# EAGLE board BatteryHolderBoard (EAGLE 7.5.0)
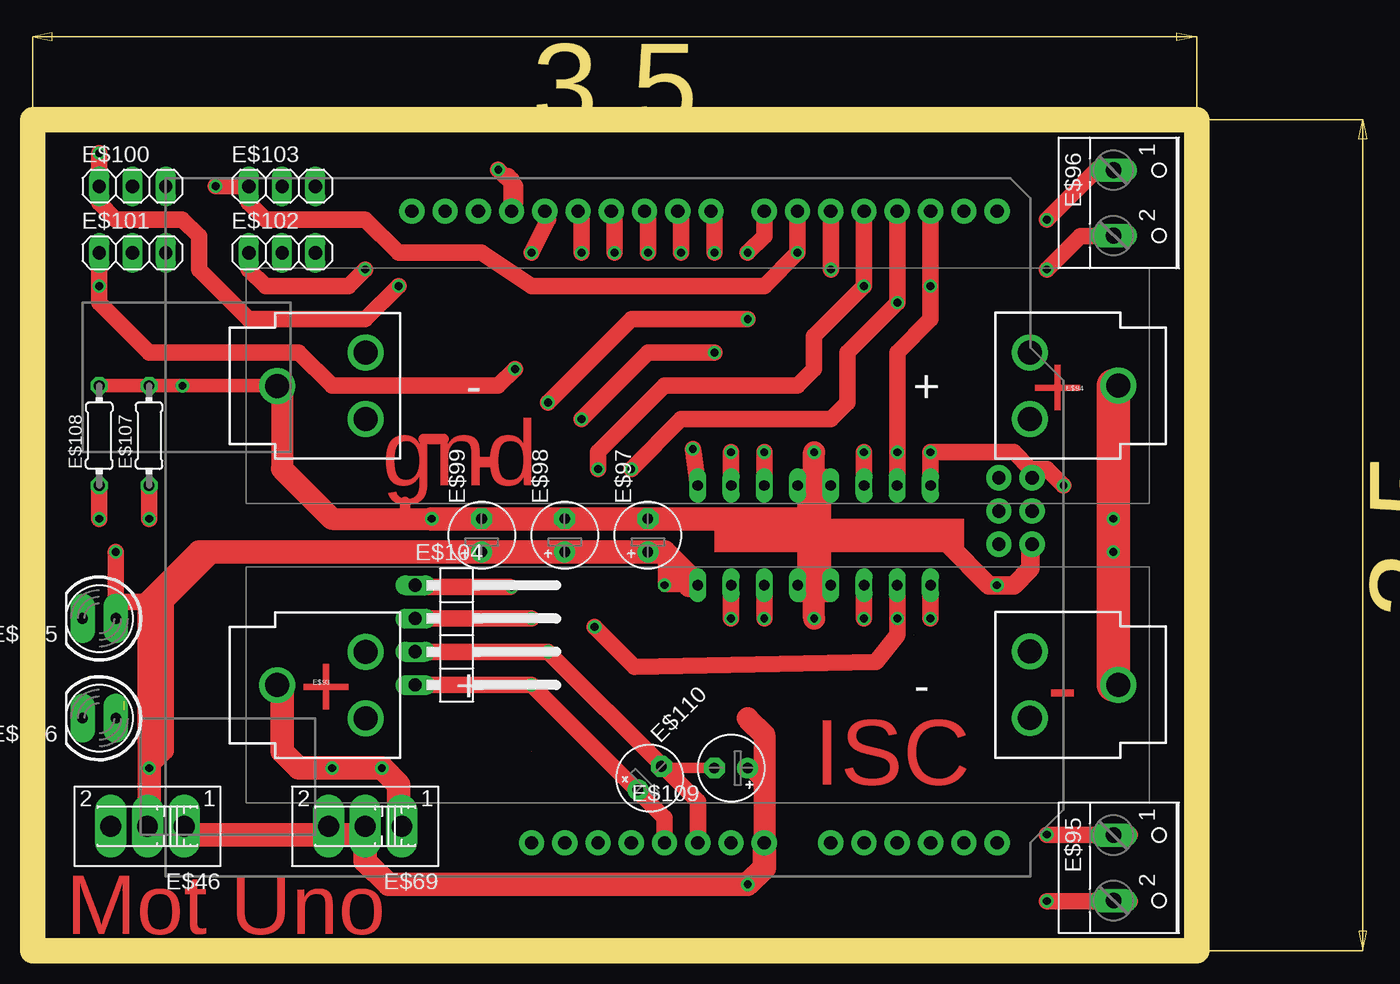
[diagram p0: board, top side]
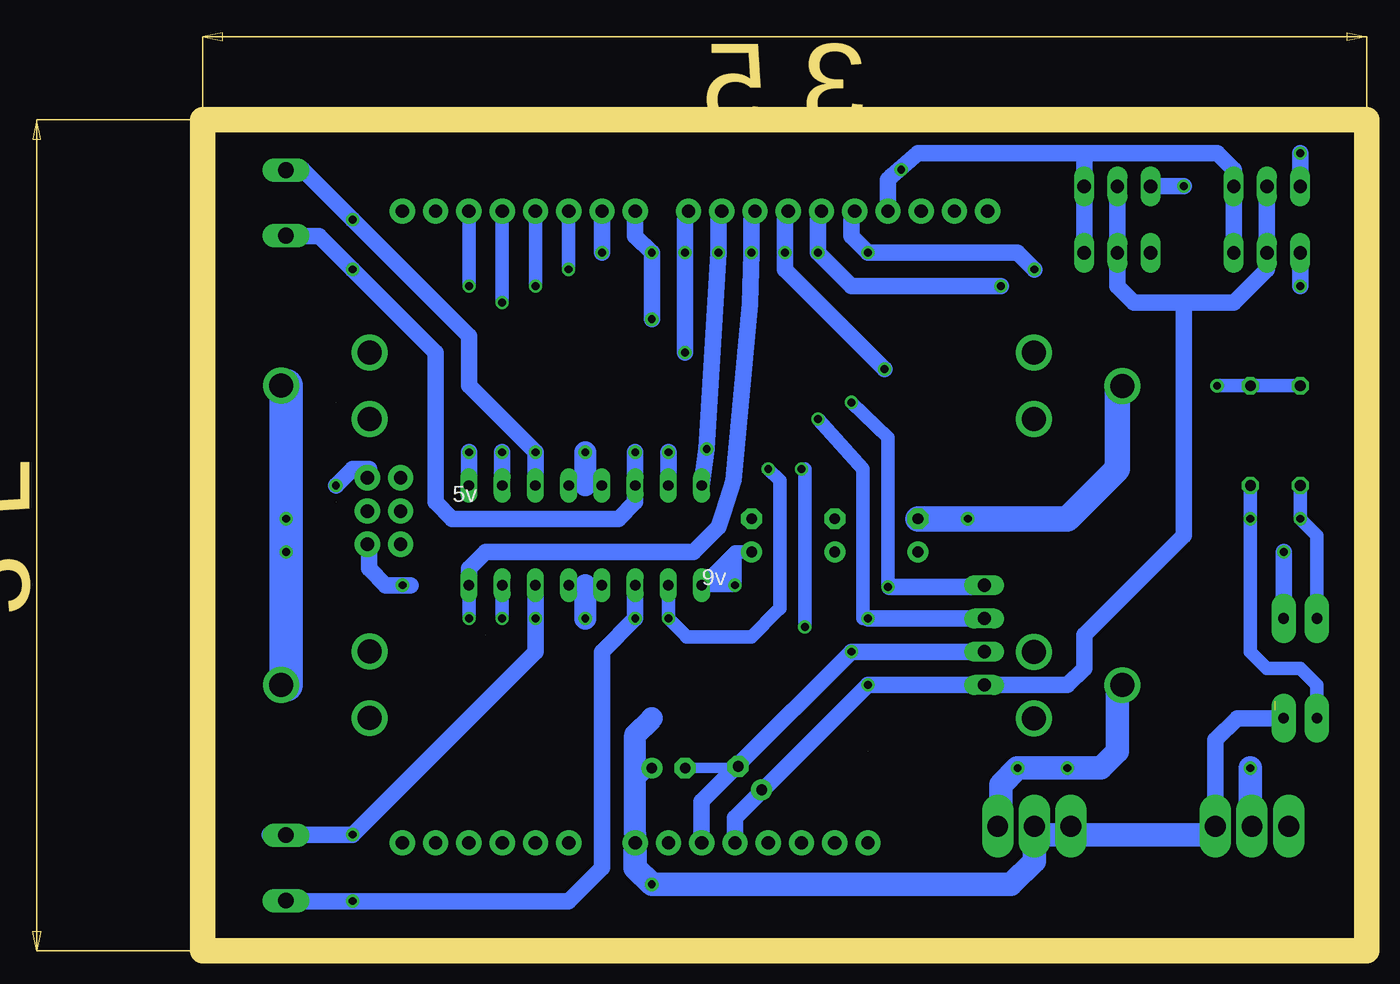
[diagram p1: board, bottom side, seen from below]

Size 88.9 x 63.5 mm. Coordinates in mm from the lower left corner, seen from the top.
Outline: 88.9,63.5 0,63.5 0,0 88.9,0 88.9,63.5
Copper layers (1*16): Top 0.035mm / dielectric 1.5mm / Bottom 0.035mm
Design rules "default": minimum track width 10mil, minimum drill 0.6mm, track to track 8mil, track to pad 8mil, pad to pad 8mil, via to via 8mil, smd to smd 8mil, copper to edge 40mil, drill to drill 8mil, minimum pad ring 10mil, minimum via ring 8mil, stop-mask expansion 4mil, vias tented up to drill 0mil, thermal gap 10mil

## Footprints (pad centres in the part's own frame; a part is rotated, then mirrored left to right if it is on the bottom)
ARDUINO_R3 = drill 1.016 pad 1.93: 3.3V 35.56,2.54; 5V 38.1,2.54; A0 50.8,2.54; A1 53.34,2.54; A2 55.88,2.54; A3 58.42,2.54; A4 60.96,2.54; A5 63.5,2.54; AREF 23.876,50.8; D0 63.5,50.8; D1 60.96,50.8; D2 58.42,50.8; D3 55.88,50.8; D4 53.34,50.8; D5 50.8,50.8; D6 48.26,50.8; D7 45.72,50.8; D8 41.656,50.8; D9 39.116,50.8; D10 36.576,50.8; D11 34.036,50.8; D12 31.496,50.8; D13 28.956,50.8; GND@1 40.64,2.54; GND@2 43.18,2.54; GND@3 26.416,50.8; GND@4 66.18,25.35; IOREF 30.48,2.54; MISO 63.64,30.43; MOSI 66.18,27.89; NC 27.94,2.54; RESET@1 33.02,2.54; RESET@2 63.64,25.35; SCK 63.64,27.89; SCL 18.796,50.8; SDA 21.336,50.8; VCC 66.18,30.43; VIN 45.72,2.54
SLIDE_SWITCH = drill 1.6 long: 1 -2.794,0; 2 0,0; 3 2.794,0
DIP16 = drill 0.8 long: P1 -8.89,-3.81; P2 -6.35,-3.81; P3 -3.81,-3.81; P4 -1.27,-3.81; P5 1.27,-3.81; P6 3.81,-3.81; P7 6.35,-3.81; P8 8.89,-3.81; P9 8.89,3.81; P10 6.35,3.81; P11 3.81,3.81; P12 1.27,3.81; P13 -1.27,3.81; P14 -3.81,3.81; P15 -6.35,3.81; P16 -8.89,3.81
BATTERY_18650-HOLDER = drill 1.829: GND@1 32.128,0.01; GND@2 25.38,2.55; GND@3 25.38,-2.53; PWR@1 -32.128,-0.01; PWR@2 -25.38,2.53; PWR@3 -25.38,-2.55
2PIN-SCREW-TERMINAL = drill 1.194 long: 1 -2.5,-1.27; 2 2.5,-1.27
E2,5-5 = drill 0.813 pad 1.6: + -1.27,0 | drill 0.813 pad 1.6 octagon: - 1.27,0
1X03 = drill 1.016 long: 1 -2.54,0; 2 0,0; 3 2.54,0
1X04/90 = drill 1.016 long: 1 -3.81,-3.81; 2 -1.27,-3.81; 3 1.27,-3.81; 4 3.81,-3.81
LED5MM = drill 0.813 pad 1.88 long: A -1.27,0; K 1.27,0
0204/7 = drill 0.813 octagon: 1 -3.81,0; 2 3.81,0

## Placement (x,y rotation side)
E$23  [ARDUINO_R3]  10.16,5.71 0 top
E$46  [SLIDE_SWITCH]  8.76,9.53 180 top
E$69  [SLIDE_SWITCH]  25.4,9.53 180 top
E$92  [DIP16]  59.69,31.75 0 bottom
E$93  [BATTERY_18650-HOLDER]  50.8,20.32 0 top
E$94  [BATTERY_18650-HOLDER]  50.8,43.18 180 top
E$95  [2PIN-SCREW-TERMINAL]  83.82,6.35 270 top
E$96  [2PIN-SCREW-TERMINAL]  83.82,57.15 270 top
E$97  [E2,5-5]  46.99,31.75 90 top
E$98  [E2,5-5]  40.64,31.75 90 top
E$99  [E2,5-5]  34.29,31.75 90 top
E$100  [1X03]  7.62,58.42 0 top
E$101  [1X03]  7.62,53.34 0 top
E$102  [1X03]  19.05,53.34 0 top
E$103  [1X03]  19.05,58.42 0 top
E$104  [1X04/90]  33.02,24.13 270 top
E$105  [LED5MM]  5.08,25.4 180 top
E$106  [LED5MM]  5.08,17.78 180 top
E$107  [0204/7]  8.89,39.37 90 top
E$108  [0204/7]  5.08,39.37 90 top
E$109  [E2,5-5]  53.34,13.97 180 top
E$110  [E2,5-5]  47.12,13.21 45 top

## Library data of the parts
E$23 E$46 E$69 E$92-E$110 = ISCTRainingProgram

## Nets
S$60: E$92.P8 E$97.+
S$61: E$92.P6
S$209: E$92.P3
S$210: E$92.P11
S$211: E$92.P14
S$214: E$92.P9
S$215: E$92.P1
S$216: E$92.P2
S$217: E$92.P16
S$218: E$92.P15
S$219: E$92.P10
S$226: E$100.2 E$103.2 E$104.4
S$227: E$101.3 E$102.3
S$228: E$23.GND@3
S$229: E$103.1
S$231: E$101.1
S$232: E$100.1
S$233: E$102.1
S$234: E$99.-
S$239: E$104.3 E$109.-
S$245: E$108.2
S$246: E$108.1
S$247: E$106.K E$107.1
S$248: E$106.A
S$251: E$109.+
S$253: E$92.P7

## Tracks (layer width: path | path; a pad name or v marks a point on that pad's centre or on a via)
S$34  (1 unrouted)
S$60  (via drill 0.6)
  Top 1.016: 48.26,29.21 v48.26,27.94 49.53,27.94 48.26,29.21 | 48.26,30.48 48.26,29.21
  Top 1.27: 8.89,26.67 6.35,26.67 v6.35,30.48 | v8.89,13.97 10.16,15.24 10.16,26.67 13.97,30.48
  Top 1.778: 8.89,10.16 v8.89,13.97 8.89,26.67 12.7,30.48 13.97,30.48 E$97.+ 48.26,30.48 50.16,28.57 50.16,27.94
  Bottom 1.016: E$97.+ 48.26,30.48 | 48.26,30.48 E$92.P8 49.53,27.94 | 49.53,27.94 v48.26,27.94 48.26,29.21 | 48.26,30.48 48.26,29.21 | 48.26,29.21 49.53,27.94
  Bottom 1.27: v6.35,30.48 6.35,26.67
  Bottom 1.778: 8.89,10.16 v8.89,13.97
S$61  (via drill 0.6)
  Top 1.27: v55.88,25.4 E$92.P6 | v77.47,3.81 83.82,3.81
  Bottom 1.27: 82.55,3.81 v77.47,3.81 60.96,3.81 58.42,6.35 58.42,22.86 v55.88,25.4 E$92.P6
S$209  (via drill 0.6)
  Top 1.27: 83.82,8.89 v77.47,8.89 | E$92.P3 v63.5,25.4
  Bottom 1.27: 83.82,8.89 v77.47,8.89 63.5,22.86 v63.5,25.4 E$92.P3
S$210  (via drill 0.6)
  Top 1.27: E$92.P11 v55.88,38.1 | v77.47,52.07 80.01,54.61 82.55,54.61
  Bottom 1.27: 82.55,54.61 80.01,54.61 v77.47,52.07 71.12,45.72 71.12,34.29 69.85,33.02 57.15,33.02 55.88,34.29 E$92.P11 v55.88,38.1
S$211  (via drill 0.6)
  Top 1.27: E$92.P14 v63.5,38.1 | v77.47,55.88 81.28,59.69 82.55,59.69
  Bottom 1.27: 82.55,59.69 81.28,59.69 v77.47,55.88 68.58,46.99 68.58,43.18 v63.5,38.1 E$92.P14
S$212  (via drill 0.6)
  Top 1.27: 69.85,31.75 69.85,31.11
  Top 1.422: 69.85,31.11 73.03,27.94 v73.66,27.94 74.93,27.94 76.2,29.21 76.2,31.11
S$213
  Bottom 1.27: 76.2,30.48 76.2,29.21 74.93,27.94 73.03,27.94
S$214  (via drill 0.6)
  Top 1.27: E$92.P9 v50.42,38.35 | 49.53,55.88 v49.53,53.34
  Bottom 1.27: 49.53,55.88 v49.53,53.34 v50.42,38.35 E$92.P9
S$215  (via drill 0.6)
  Top 1.27: 46.99,55.88 v46.99,53.34 | v68.58,25.4 E$92.P1
  Bottom 1.016: v68.58,25.4 E$92.P1
  Bottom 1.27: E$92.P1 68.58,29.21 67.31,30.48 51.44,30.48 49.53,32.38 49.15,33.53 48.39,35.94 47.12,49.4 v46.99,53.34 46.99,55.88
S$216  (via drill 0.6)
  Top 1.27: E$92.P2 66.04,24.13 64.39,22.1 45.97,21.72 42.93,24.77
  Bottom 1.016: v66.04,25.4 E$92.P2
S$217  (via drill 0.6)
  Top 1.27: v78.74,35.56 77.47,36.83 76.2,36.83 74.93,38.1 v68.58,38.1 E$92.P16
  Bottom 1.27: 76.2,36.83 77.47,36.83 v78.74,35.56 | v68.58,38.1 E$92.P16
S$218  (via drill 0.6)
  Top 1.27: E$92.P15 66.04,45.72 68.58,48.26 v68.58,50.8 68.58,55.88
  Bottom 1.016: v68.58,50.8 68.58,55.88
  Bottom 1.27: E$92.P15 v66.04,38.1
S$219  (via drill 0.6)
  Top 1.27: E$92.P10 v53.34,38.1
  Bottom 1.27: E$92.P10 v53.34,38.1
S$220
  Bottom 1.016: 42.93,24.77 42.93,35.05
S$221  (via drill 0.6)
  Top 1.27: v45.72,36.83 49.53,40.64 60.96,40.64 62.23,41.91 62.23,45.72 v66.04,49.53 66.04,55.88
  Bottom 1.016: v45.72,36.83 44.83,35.94 44.83,26.16 | v66.04,49.53 66.04,55.88
S$222  (via drill 0.6)
  other vias: 42.93,24.77
S$223  (via drill 0.6)
  Top 1.27: v43.18,36.83 43.18,38.1 48.26,43.18 58.42,43.18 59.69,44.45 59.69,46.99 v63.5,50.8 63.5,55.88
  Bottom 1.016: v63.5,50.8 63.5,55.88
S$224  (via drill 0.6)
  Top 1.27: v60.96,52.07 60.96,55.88
  Bottom 1.016: v60.96,52.07 60.96,55.88
S$225
  Bottom 1.016: 42.93,35.18 42.93,36.83
S$226  (via drill 0.6)
  Top 1.27: E$104.4 v38.1,20.32 48.26,10.16 48.26,8.89
  Bottom 1.27: 13.97,49.53 10.16,49.53 7.62,52.07 E$100.2 | 13.97,49.53 13.97,31.75 21.59,24.13 21.59,21.59 22.86,20.32 E$104.4 v38.1,20.32 48.26,10.16 48.26,8.89 | 13.97,49.53 17.78,49.53 19.05,50.8 E$103.2
S$227
  Bottom 1.27: E$101.3 10.16,59.69 11.43,60.96 21.59,60.96 | 21.59,60.96 34.29,60.96 36.32,59.18 36.58,58.93 36.58,56.39 | 21.59,60.96 E$102.3
S$228
  Top 1.27: 36.32,59.18 36.58,58.93 E$23.GND@3
S$229  (via drill 0.6)
  Top 1.27: v58.42,53.34 55.88,50.8 38.1,50.8 34.29,53.34 27.94,53.34 25.4,55.88 17.78,55.88 16.51,57.15 E$103.1 v13.97,58.42
  Bottom 1.27: v58.42,53.34 58.42,55.88 | E$103.1 v13.97,58.42
S$230
  Top 1.27: 58.42,55.88 58.42,53.34
S$231  (via drill 0.6)
  Top 1.27: v36.83,44.45 35.56,43.18 22.86,43.18 20.32,45.72 8.89,45.72 5.08,49.53 v5.08,50.8 E$101.1 | 44.45,55.88 v44.45,53.34
  Bottom 1.27: 44.45,55.88 v44.45,53.34 44.45,52.07 v36.83,44.45 | E$101.1 v5.08,50.8
S$232  (via drill 0.6)
  Top 1.27: v27.94,50.8 25.4,48.26 16.51,48.26 12.7,52.07 12.7,54.61 11.43,55.88 6.35,55.88 5.08,57.15 v5.08,60.96 | 41.91,55.88 v41.91,53.34
  Bottom 1.27: 41.91,55.88 v41.91,53.34 39.37,50.8 v27.94,50.8 | v5.08,60.96 E$100.1
S$233  (via drill 0.6)
  Top 1.27: v25.4,52.07 24.13,50.8 17.78,50.8 16.51,52.07 E$102.1 | 39.37,55.88 v38.1,53.34
  Bottom 1.27: 39.37,55.88 39.37,54.61 v38.1,53.34 26.67,53.34 v25.4,52.07
S$234
  Bottom 1.93: 19.05,43.18 19.05,36.83 22.86,33.02 E$99.-
S$235  (via drill 0.6)
  Top 1.27: 55.88,55.88 55.88,54.61 v54.61,53.34 | v54.61,48.26 45.72,48.26 v39.37,41.91
  Bottom 1.016: v39.37,41.91 36.58,39.24 v36.58,27.81
  Bottom 1.27: 55.88,55.88 55.88,54.61 v54.61,53.34 v54.61,48.26
S$236  (via drill 0.6)
  Top 1.27: 52.07,55.88 v52.07,53.34 | v52.07,45.72 46.99,45.72 v41.91,40.64
  Bottom 1.016: 38.48,25.4 38.48,36.83 v41.91,40.64
  Bottom 1.27: 52.07,55.88 v52.07,53.34 v52.07,45.72
S$237  (via drill 0.6)
  Top 1.676: v59.69,25.4 59.69,27.94
  Bottom 1.676: v59.69,25.4 59.69,27.94
S$238  (via drill 0.6)
  Top 1.676: 59.69,35.56 v59.69,38.1
  Bottom 1.676: 59.69,35.56 v59.69,38.1
S$239  (via drill 0.6)
  Top 0.813: E$109.- 48.26,13.97
  Top 1.27: E$104.3 v39.37,22.86 48.26,13.97 50.8,11.43 50.8,8.89
  Bottom 0.813: 48.26,13.97 E$109.-
  Bottom 1.27: 50.8,8.89 50.8,11.43 48.26,13.97 v39.37,22.86 E$104.3
S$240  (via drill 0.6)
  Top 1.27: v38.1,25.4 29.46,25.4
  Bottom 1.27: 29.46,25.4 v38.1,25.4
S$241
  Top 1.27: 36.45,27.81 29.21,27.81
S$242
  Bottom 1.27: 29.21,27.81 36.45,27.81
S$243  (via drill 0.6)
  Top 2.54: 82.55,20.32 v82.55,30.48 v82.55,33.02 82.55,43.18
  Bottom 2.54: 82.55,43.18 v82.55,33.02 v82.55,30.48 82.55,20.32
S$244  (via drill 0.6)
  Top 1.778: 19.05,20.32 19.05,15.24 20.32,13.97 v22.86,13.97 v26.67,13.97 27.94,12.7 27.94,8.89
  Bottom 1.778: 27.94,8.89 27.94,12.7 v26.67,13.97 v22.86,13.97 20.32,13.97 19.05,15.24 19.05,20.32
S$245  (via drill 0.6)
  Top 0.813: 28.45,34.29 28.45,33.02
  Top 1.016: E$108.2 v11.43,43.18 19.05,43.18
  Top 1.676: 19.05,43.18 19.05,36.83 22.86,33.02 28.45,33.02 v30.48,33.02
  Top 1.778: v30.48,33.02 58.42,33.02
  Bottom 1.016: E$108.2 v11.43,43.18
S$246  (via drill 0.6)
  Top 1.27: v5.08,33.02 E$108.1
  Bottom 1.016: 3.81,26.67 3.81,31.75 v5.08,33.02 E$108.1
S$247  (via drill 0.6)
  Top 1.27: v8.89,33.02 E$107.1
  Bottom 1.016: E$107.1 v8.89,33.02 8.89,22.86 7.62,21.59 5.08,21.59 3.81,20.32 E$106.K
S$248
  Bottom 1.27: E$106.A 9.91,17.78 11.56,16.13 11.56,9.27
S$249
  Top 0.813: 29.84,39.12 31.37,39.12
S$250
  Top 0.813: 34.04,37.34 35.05,37.34
S$251  (via drill 0.6)
  Top 1.016: 55.88,12.7 E$109.+
  Top 1.676: 54.61,17.78 55.88,16.51 55.88,12.7 55.88,7.62
  Top 1.778: 25.4,8.89 11.43,8.89 | 55.88,7.62 55.88,6.35 v54.61,5.08 27.18,5.08 25.4,6.86 25.4,7.62
  Bottom 0.813: 55.88,8.89 55.88,12.7 E$109.+
  Bottom 1.676: 55.88,8.89 55.88,16.51 54.61,17.78
  Bottom 1.778: 55.88,7.62 55.88,6.35 v54.61,5.08 27.18,5.08 25.4,6.86 25.4,8.89 11.43,8.89
S$252
  Bottom 1.016: 44.96,26.04 46.99,24 51.94,24
S$253  (via drill 0.6)
  Top 1.27: E$92.P7 v53.34,25.4
  Bottom 1.016: E$92.P7 v53.34,25.4 52.07,24.13
S$254  (via drill 0.6)
  Top 1.27: v35.56,59.69 36.83,58.42 36.83,57.15
S$276  (1 unrouted)
S$279  (1 unrouted)
S$311  (1 unrouted)
S$312  (1 unrouted)
S$328  (1 unrouted)
S$331  (1 unrouted)
S$361  (1 unrouted)
S$362  (1 unrouted)
S$377  (1 unrouted)
S$380  (1 unrouted)
S$410  (1 unrouted)
S$411  (1 unrouted)
S$427  (1 unrouted)
S$430  (1 unrouted)
S$461  (1 unrouted)
S$462  (1 unrouted)
(copper drawn outside any net)
  shapes: Top area x2

## Text on the board
Top: + | gnd | + | - | ISC | Mot Uno